# Altium PCB Jukebox PCB.PCBDOC (part 2 of 3)
Units mil, origin at the board's own origin, x right, y up, seen from the top; angles counter-clockwise.
Board outline 8310.03 x 5810.03 mil, 2 copper layers (Top Layer, Bottom Layer); 153 components, 235 nets, 1170 pads, 408 vias.
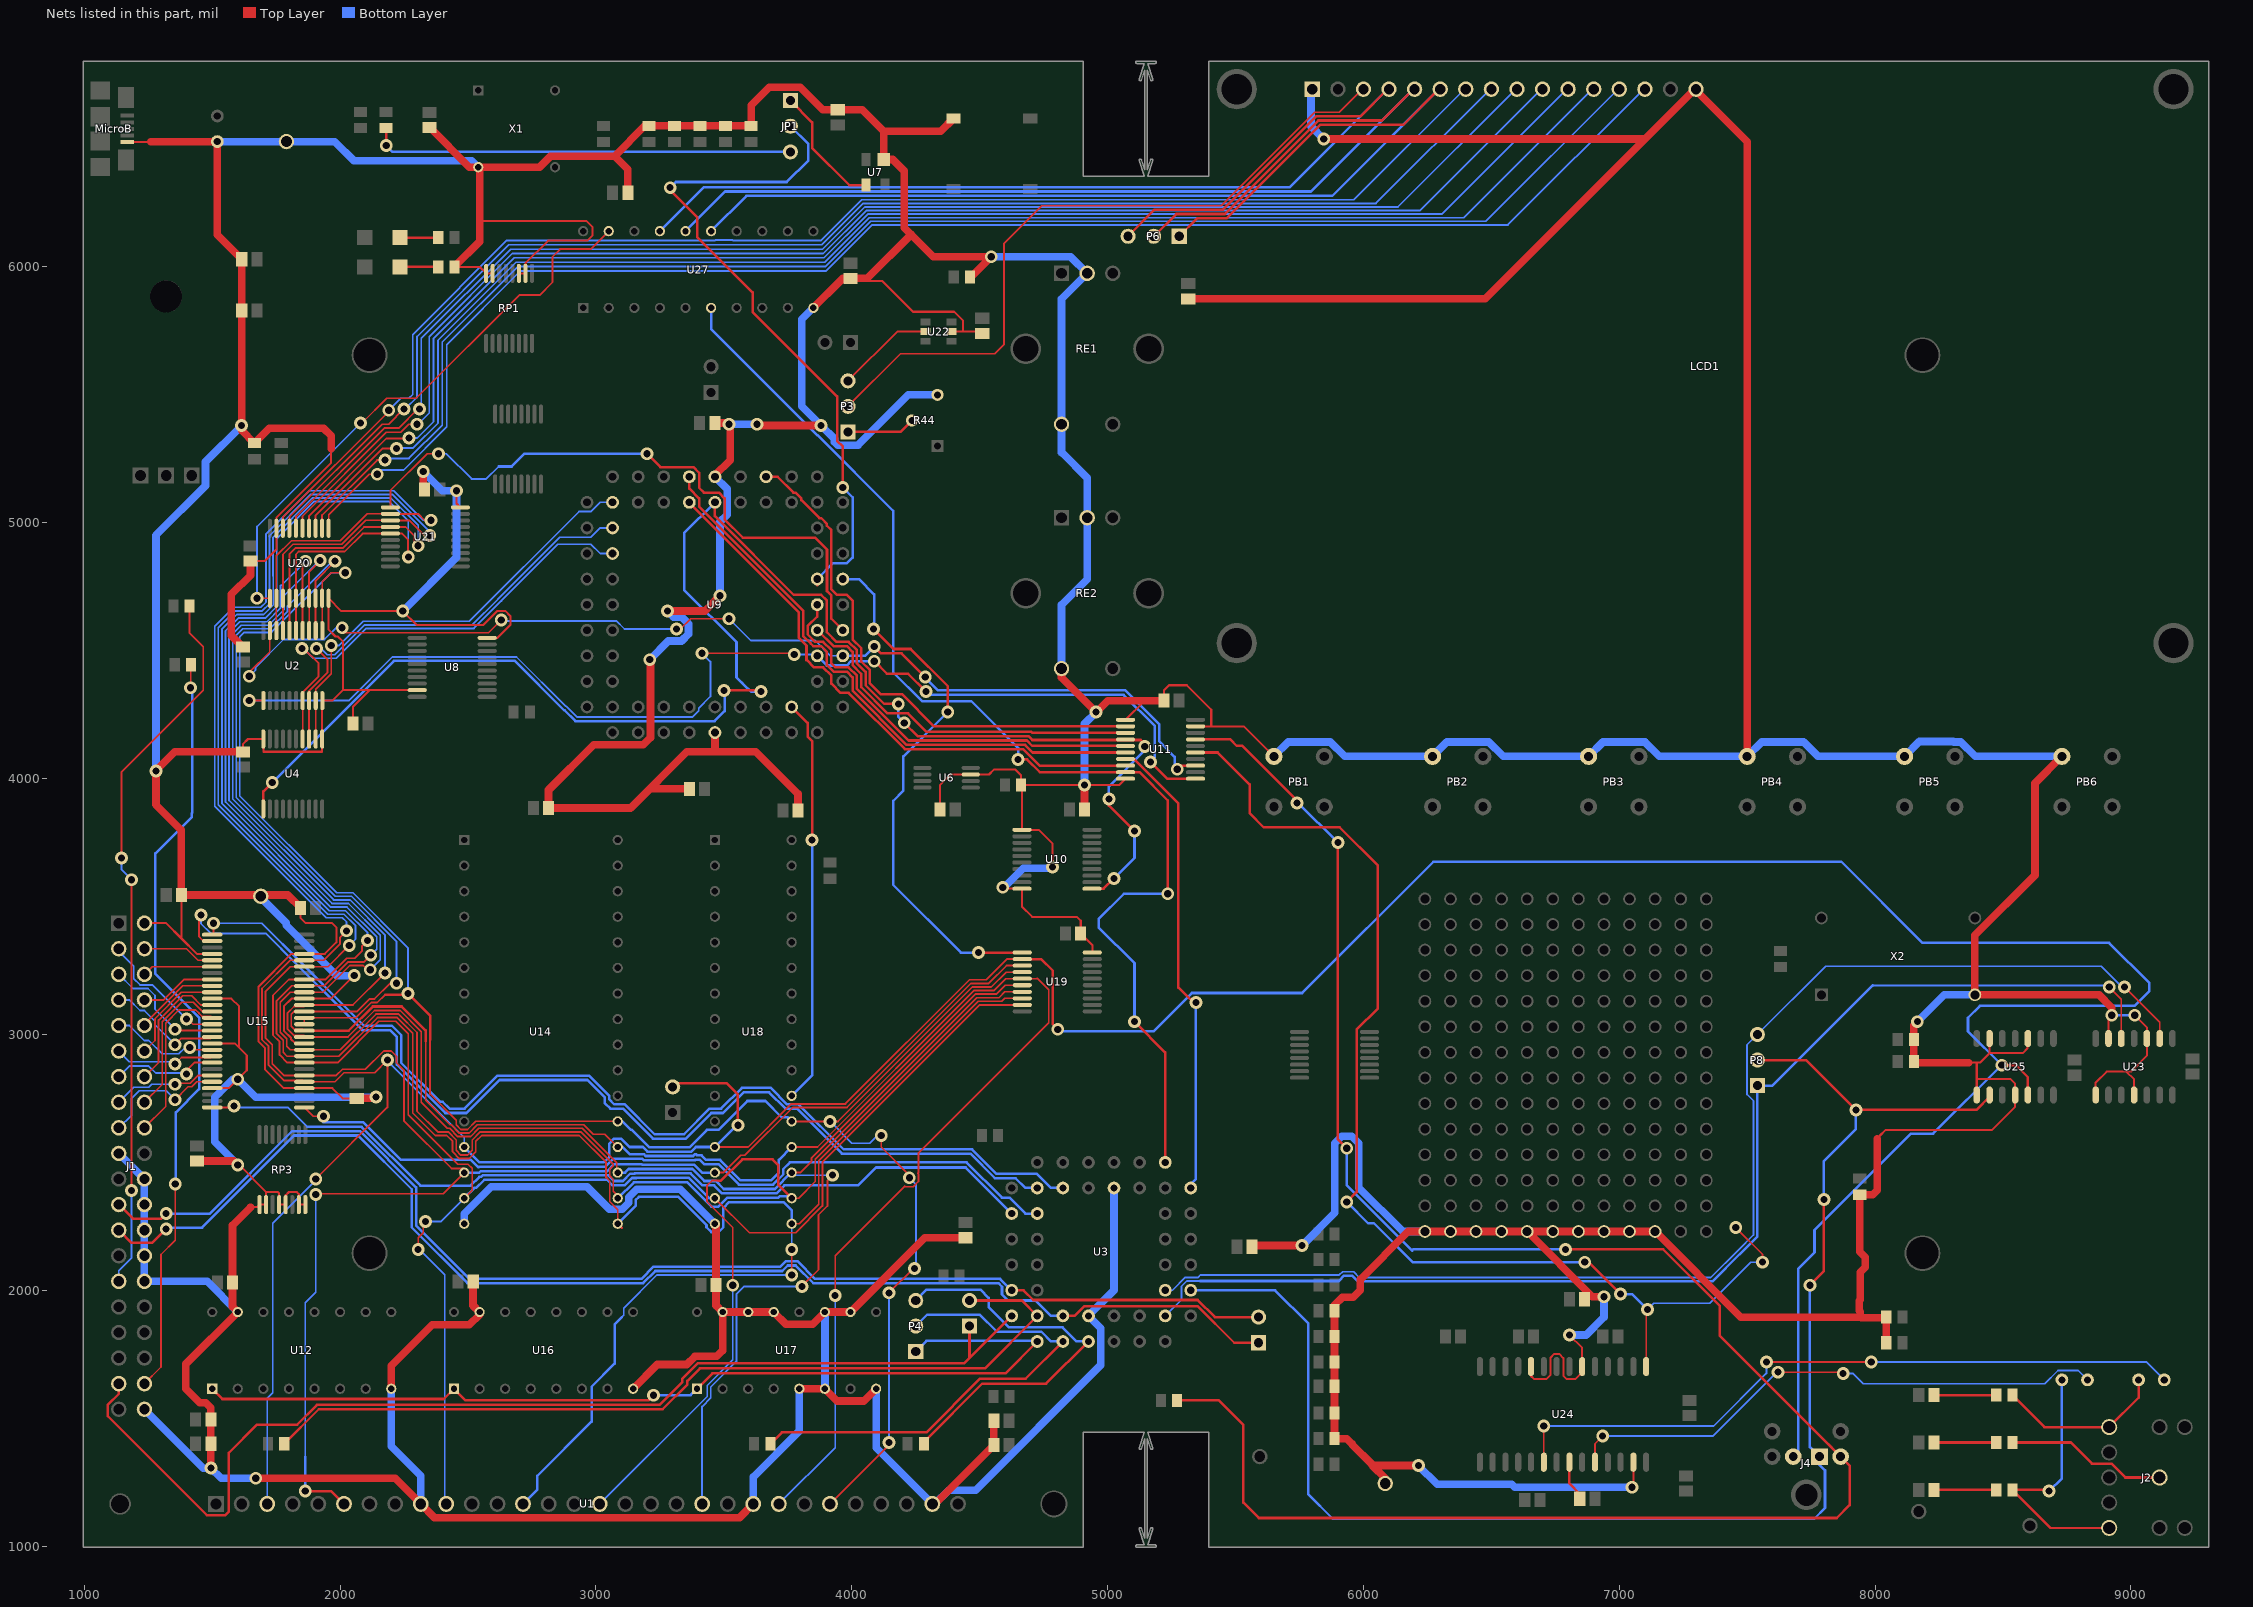
[diagram p2: the nets of this part, all layers, seen from the top]

## Via types
v1: diameter 50, hole 28, Top Layer to Bottom Layer, 408 vias

## Nets (pads, with @x,y where several pads share a name; then routed paths per layer and width w, separated by ;. In a path a pad name is that pad's centre, name@x,y a point inside that pad or via, vN(x,y) a via of type N, cw(c..) or ccw(c..) an arc to the next point about the centre after c; other vN are vias at no path point) (continued)
CPU_AD5: U2.7 U4.4 U9.6 | length 1840.2
  Top Layer w7: v1(1851,4508.32) 1857.8,4508.32 1915.9,4450.22 1915.9,4400.5 1853.54,4338.14 U2.7@1853.54,4305 1853.54,4155.31 U4.4@1853.23,4155
  Bottom Layer w7: v1(1851,4508.32) 1857.8,4508.32 1895.62,4470.5 1985.5,4470.5 2102,4587 2523,4587 2630.5,4694.5 2630.5,4695.5 2851.4,4916.4 2980.08,4916.4 3016.48,4880 U9.6@3065,4880
CPU_AD6: U2.8 U4.3 U9.4 | length 1773.7
  Top Layer w7: U4.3@1878.82,4155 1878.82,4343.62 1951,4415.8 1951,4465.32 v1(1908,4508.32)
  Bottom Layer w7: v1(1908,4508.32) 1926.47,4508.32 1950.3,4484.5 1979.7,4484.5 2096.2,4601 2517.2,4601 2616.5,4700.3 2616.5,4701.3 2858.8,4943.6 2980.08,4943.6 3016.48,4980 U9.4@3065,4980
CPU_AD7: U2.9 U4.2 U9.2 | length 1722.1
  Top Layer w7: U4.2@1904.41,4155 1904.72,4155.31 U2.9@1904.72,4305 1904.72,4349.72 1965,4410 v1(1965,4520)
  Bottom Layer w7: v1(1965,4520) 1995,4520 2090,4615 2505,4615 2933.6,5043.6 2980.08,5043.6 3016.48,5080 U9.2@3065,5080
CPU_ALE: U4.11 U9.61 U10.11 U11.4 | length 6389.7
  Top Layer w10: U4.11@1699.69,3881.38 1699.69,3949.69 v1(1735,3985) ; U9.61@3465,5080 3465,5025.96 3773.06,4717.9 3880.7,4717.9 3902.9,4695.7 3902.9,4572.1 3940.1,4534.9 3987.74,4534.9 4019.9,4502.74 4019.9,4450.82 4053.9,4416.82 4053.9,4364.91 4126.81,4292 v1(4182,4292) ; v1(3500,4345) 3640,4345 v1(3645,4340) ; v1(4205.05,4218) 4257.05,4166 4691.12,4166 4706.06,4151.06 5128.94,4151.06 5145,4135 v1(5145,4125) ; U10.11@4938.62,3569.69 4984.69,3569.69 v1(5025,3610) ; v1(5005,3920) 5005,3895 v1(5105,3795)
  Bottom Layer w10: v1(1735,3985) 2210,4460 2683.08,4460 2876.08,4267 2878,4267 2920,4225 3463.6,4225 3502.9,4264.3 3502.9,4342.1 v1(3500,4345) ; U9.61@3465,5080 3345,4960 3345,4738.08 3549.33,4533.76 3549.33,4396.08 3571,4374.41 3571,4374 3593.1,4351.9 3594.78,4351.9 3606.68,4340 v1(3645,4340) ; v1(4182,4292) 4182,4241.05 v1(4205.05,4218) ; v1(5005,3920) 5005,3970 5145,4110 v1(5145,4125) ; v1(5025,3610) 5105,3690 v1(5105,3795)
CPU_CLK: U9.56 U11.2 | length 2102.9
  Top Layer w10: U9.56@3665,5180 3710,5180 3772.1,5117.9 3780.7,5117.9 3802.9,5095.7 3802.9,5088.5 3873.5,5017.9 3880.7,5017.9 3902.9,4995.7 3902.9,4988.5 3920,4971.4 3920,4740 3942.1,4717.9 3980.7,4717.9 4002.9,4695.7 4002.9,4543.78 4036.9,4509.78 4036.9,4457.86 4070.9,4423.86 4070.9,4371.95 4113.85,4329 4197.33,4329 4321.92,4204.41 U11.2@5070,4204.41
CPU_DEN: U2.19 U9.39 U11.13 | length 4409.1
  Top Layer w7: v1(1645,4400) 1645,4415 1725,4495 1725,4578.03 U2.19@1725.59,4578.62 ; v1(2007.92,4590) 2007.92,4570 2580,4570 v1(2630,4620) ; v1(3315,4585) 3330,4585 3370,4625 v1(3520,4625)
  Top Layer w10: v1(4088,4516.09) 4114.38,4489.71 4194.29,4489.71 v1(4287,4397) ; v1(5272.3,4036.69) 5286.48,4050.87 U11.13@5343.62,4050.87
  Bottom Layer w7: v1(1645,4400) 1669.5,4424.5 1669.5,4434.7 1778.62,4543.82 1938.62,4543.82 1984.8,4590 v1(2007.92,4590) ; v1(2630,4620) 2633.6,4616.4 3080.08,4616.4 3111.48,4585 v1(3315,4585) ; v1(3520,4625) 3605,4540 3856.48,4540 3916.48,4480 U9.39@3965,4480
  Bottom Layer w10: U9.39@3965,4480 4051.91,4480 v1(4088,4516.09) ; v1(4287,4397) 4287,4395.33 4337.65,4344.67 5069.37,4344.67 5202,4212.04 5202,4145.33 5262,4085.33 5262,4046.98 v1(5272.3,4036.69)
CPU_DTR: U2.1 U9.40 U11.11 | length 4507.2
  Top Layer w7: v1(1645,4305) U2.1@1700,4305 ; v1(3415,4490) 3770,4490 v1(3775,4485)
  Top Layer w10: v1(4088,4459.09) 4137.09,4410 4220,4410 v1(4290,4340) ; v1(5167.39,4064.71) 5232.41,3999.69 U11.11@5343.62,3999.69
  Bottom Layer w7: v1(1645,4305) 2033.08,4305 2203.58,4475.5 2689.5,4475.5 2882.5,4282.5 2884.42,4282.5 2926.42,4240.5 3376.98,4240.5 3401.4,4264.92 3401.4,4275.06 3447.5,4321.16 3447.5,4457.5 v1(3415,4490) ; v1(3775,4485) 3860,4485 U9.40@3865,4480
  Bottom Layer w10: U9.40@3865,4480 3902.9,4442.1 3980.7,4442.1 3997.69,4459.09 v1(4088,4459.09) ; v1(4290,4340) 4290,4327.67 5062.33,4327.67 5185,4205 5185,4082.33 v1(5167.39,4064.71)
CPU_RD: U9.62 U11.6 | length 2316.5
  Top Layer w10: U9.62@3365,5180 3365,5133.6 3402.9,5095.7 3402.9,5064.02 3810.1,4656.82 3810.1,4557.26 3839.94,4527.42 3839.94,4527.26 3849.3,4517.9 3880.7,4517.9 3902.9,4495.7 3902.9,4443.78 3928.78,4417.9 3980.7,4417.9 4002.9,4395.7 4002.9,4343.78 4214.68,4132 4677.04,4132 4706.99,4102.05 U11.6@5070,4102.05
CPU_WR: U9.63 U11.8 | length 2242.8
  Top Layer w10: U9.63@3365,5080 3365,5077.88 3793.1,4649.78 3793.1,4550.22 3822.94,4520.38 3822.94,4463 3824.12,4463 3852.22,4434.9 3887.74,4434.9 3919.9,4402.74 3919.9,4371.5 3956.5,4334.9 3987.74,4334.9 4207.64,4115 4670,4115 4734.13,4050.87 U11.8@5070,4050.87
D0: J4.2 P7.2 U1.3 U2.18 U14.13 U15.5 U15.24 U18.13 U19.12 U20.2 U21.12 U25.5 | length 18721.9
  Top Layer w7: U2.18@1751.18,4578.62 1750.59,4579.21 U20.2@1750.59,4705 1750.59,4870.59 1809.82,4929.82 2000.42,4929.82 2105.6,5035 U21.12@2183.47,5035 ; v1(1905,2435) 2185,2715 v1(2185,2900) 2135.5,2850.5 2125.3,2850.5 2124.8,2850 2015,2850 1980,2815 U15.5@1860,2815 1854.4,2820.6 1779.9,2820.6 1720.5,2880 1720.5,2953.64 1694.6,2979.54 1694.6,3179.6 1805,3290 U15.24@1860,3290 1935.51,3290 2000,3354.49 2000,3380 v1(2025,3405) ; U21.12@2196.38,5034.72 2305.28,5034.72 2329.8,5010.2 v1(2355,5010.2) ; U18.13@3465,2560 3595,2560 3763.6,2728.6 3975.01,2728.6 4460,3213.59 4525.3,3213.59 4606.43,3294.72 U19.12@4666.38,3294.72
  Top Layer w10: P7.2@3300,2795 3315,2810 3510,2810 3555,2765 v1(3555,2645) ; U19.12@4666.38,3294.72 4740.28,3294.72 4785.5,3249.5 4785.5,3039.5 v1(4805,3020) ; v1(8495,2880) 8550,2880 8597.2,2832.8 U25.5@8597.2,2763.46
  Bottom Layer w7: U1.3@1715,1165 1715,1578.52 1736.4,1599.92 1736.4,2261.4 1905,2430 v1(1905,2435) ; v1(2025,3405) 2025,3440 2009.1,3455.9 1945.51,3455.9 1510,3891.41 1510,4595 1584.5,4669.5 1689.7,4669.5 1710.5,4690.3 1710.5,4774 1710,4774.5 1710,4955 1880,5125 2209.8,5125 2324.59,5010.2 v1(2355,5010.2) ; v1(2185,2900) 2185,2897.2 2485,2597.2 U14.13@2485,2560
  Bottom Layer w10: U14.13@2485,2560 2545,2500 3030.39,2500 3052.1,2521.71 3052.1,2573.63 3071.37,2592.9 3098.63,2592.9 3131.53,2560 3183.44,2560 3201.44,2542 3372.6,2542 3390.6,2560 U18.13@3465,2560 3550,2645 v1(3555,2645) ; v1(4805,3020) 4812,3013 5180.67,3013 5329.67,3162 5760,3162 6273,3675 7867.67,3675 8184.67,3358 8914.33,3358 9072,3200.33 9072,3169.67 9014.33,3112 8409.67,3112 8363,3065.33 8363,3012 v1(8495,2880) 8227,2612 8139.77,2612 7763,2235.23 7763,2148 7700,2085 7700,1370.04 J4.2@7679.96,1350
D1: U1.6 U2.17 U14.14 U15.6 U15.23 U18.14 U19.13 U20.3 U21.13 | length 10072.1
  Top Layer w7: U2.17@1776.77,4578.62 1776.77,4704.41 U20.3@1776.18,4705 1776.18,4876.18 1815.82,4915.82 2006.22,4915.82 2100.4,5010 U21.13@2182.88,5010 ; v1(1905,2375) 1907.5,2377.5 2402.5,2377.5 U14.14@2485,2460 2485,2476 2435.77,2476 2249.5,2662.27 2249.5,2860.5 2220.5,2889.5 2220.5,2914.7 2199.7,2935.5 2170.3,2935.5 2098.8,2864 2009.2,2864 1985.2,2840 U15.6@1860,2840 1780.3,2840 1734.5,2885.8 1734.5,2959.44 1708.6,2985.34 1708.6,3169.11 1804.49,3265 U15.23@1860,3265 1952.5,3265 v1(2035.5,3348) ; U21.13@2196.38,5009.13 2270.87,5009.13 2330,4950 v1(2350,4950) ; U18.14@3465,2460 3498.08,2460 3565.58,2527.5 3582.3,2527.5 3769.4,2714.6 3980.81,2714.6 4465.8,3199.59 4535.34,3199.59 4604.88,3269.13 U19.13@4666.38,3269.13
  Top Layer w10: v1(1863.6,1215) 1965,1215 U1.6@2015,1165
  Bottom Layer w7: 1863.6,1350 1863.6,1951.4 1905,1992.8 v1(1905,2375) ; v1(2035.5,3348) 2060.5,3373 2060.5,3424.5 2015.1,3469.9 1951.31,3469.9 1524,3897.21 1524,4589.2 1590.3,4655.5 1695.5,4655.5 1724.5,4684.5 1724.5,4784.5 1724,4785 1724,4949.2 1885.8,5111 2204,5111 2350,4965 v1(2350,4950)
  Bottom Layer w10: v1(1863.6,1215) 1863.6,1350 ; U14.14@2485,2460 2543.73,2460 2549.73,2466 3044.47,2466 3071.37,2492.9 3178.42,2492.9 3180.32,2491 3383.64,2491 3414.64,2460 U18.14@3465,2460
D2: U1.10 U2.16 U14.15 U15.8 U15.21 U18.15 U19.19 U20.4 U21.14 | length 9889.1
  Top Layer w7: U2.16@1802.36,4578.62 1801.77,4579.21 U20.4@1801.77,4705 1801.77,4876.77 1826.82,4901.82 2012.02,4901.82 2093.74,4983.54 U21.14@2196.38,4983.54 2256.46,4983.54 2290,4950 2290,4925 v1(2305,4910) v1@2300,4905 ; v1(2107.5,3367.19) 2086,3345.69 2086,3327.08 2056.42,3297.5 2026.01,3297.5 1943.51,3215 U15.21@1860,3215 1800,3215 1737.6,3152.6 1737.6,2997.35 1763.5,2971.45 1763.5,2920 1793.5,2890 U15.8@1860,2890 1990,2890 2151.77,3051.77 2216.91,3051.77 2266.5,3002.18 2266.5,2686.01 2459.51,2493 2500,2493 2516.4,2476.6 2516.4,2391.4 U14.15@2485,2360 ; v1(2305,2160) 2305,2205 2325,2225 2325,2259.33 v1(2334,2268.33) ; U18.15@3465,2360 3600,2225 3780.2,2225 3885,2329.8 3885,2500 4500.59,3115.59 U19.19@4666.38,3115.59
  Bottom Layer w7: v1(2107.5,3367.19) 2107.5,3397.5 2021.1,3483.9 1957.11,3483.9 1538,3903.01 1538,4583.4 1596.1,4641.5 1701.3,4641.5 1738.5,4678.7 1738.5,4790.8 1738,4791.3 1738,4943.4 1891.6,5097 2198.2,5097 2305,4990.2 v1(2305,4910) ; v1(2305,2160) 2310,2160 2408.6,2061.4 2408.6,1171.4 U1.10@2415,1165 ; v1(2334,2268.33) 2393.33,2268.33 U14.15@2485,2360
  Bottom Layer w10: U14.15@2485,2360 2525,2400 2531.82,2400 2563.82,2432 3042.43,2432 3064.33,2410.1 3112.2,2410.1 3141.11,2439 3158.2,2439 3159.2,2440 3362.51,2440 3442.51,2360 U18.15@3465,2360
D3: U1.13 U2.15 U14.17 U15.9 U15.20 U18.17 U19.18 U20.5 U21.15 | length 10630
  Top Layer w7: U2.15@1827.95,4578.62 1827.95,4704.41 U20.5@1827.36,4705 1827.36,4877.36 1837.82,4887.82 2017.82,4887.82 2087.95,4957.95 U21.15@2196.38,4957.95 2242.05,4957.95 2265,4935 2265,4867.68 v1(2266.68,4866) ; v1(2120,3310) 2093.5,3283.5 2031.81,3283.5 1938.31,3190 U15.20@1860,3190 1810.2,3190 1751.6,3131.4 1751.6,3003.15 1777.5,2977.25 1777.5,2930 1792.5,2915 U15.9@1860,2915 1995.2,2915 2145.97,3065.77 2222.71,3065.77 2283.5,3004.98 2283.5,2693.05 2371.55,2605 2416.4,2605 2439.6,2581.8 2439.6,2541.19 2466.19,2514.6 2503.81,2514.6 2530.4,2541.19 2530.4,2581.8 2553.6,2605 2935,2605 3039.6,2500.4 3039.6,2441.19 3053.6,2427.19 3053.6,2346.99 3085,2315.59 U14.17@3085,2260 ; v1(3765,2060) v1(3765,2160) ; U18.17@3765,2260 3795.4,2260 3871,2335.6 3871,2505.8 4494.79,3129.59 4585.55,3129.59 4597.14,3141.18 U19.18@4666.38,3141.18
  Top Layer w10: U14.17@3085,2260 3100,2245
  Bottom Layer w7: v1(2120,3310) 2143,3333 2143,3381.89 2026.99,3497.9 1962.9,3497.9 1552,3908.8 1552,4577.6 1601.9,4627.5 1707.1,4627.5 1752.5,4672.9 1752.5,4797.1 1752,4797.6 1752,4937.6 1897.4,5083 2192.4,5083 2266.68,5008.72 v1(2266.68,4866) ; 3100,1894.04 3108.6,1902.64 3108.6,1930.08 3238.52,2060 v1(3765,2060) ; v1(3765,2160) U18.17@3765,2260
  Bottom Layer w10: U1.13@2715,1165 2771.1,1221.1 2771.1,1275.14 2982.9,1486.94 2982.9,1622.9 3073,1713 3073,1867.04 3100,1894.04 ; U14.17@3085,2260 3154.9,2329.9 3154.9,2331.05 3154.9,2352.39 3167.51,2365 3321.82,2365 3432.1,2254.72 3432.1,2246.37 3451.37,2227.1 3478.63,2227.1 3497.9,2246.37 3497.9,2322.33 3520.57,2345 3733.47,2345 3765,2313.47 U18.17@3765,2260
D4: U1.16 U2.14 U14.18 U15.10 U15.19 U18.18 U19.17 U20.6 | length 9033.6
  Top Layer w7: U2.14@1853.54,4578.62 1852.95,4579.21 U20.6@1852.95,4705 1852.95,4837.95 v1(1865,4850) ; v1(2118,3253) 2107,3253 2090.5,3269.5 2037.61,3269.5 1933.11,3165 U15.19@1860,3165 1805,3165 1765.6,3125.6 1765.6,3008.95 1791.5,2983.05 1791.5,2953.5 1805,2940 U15.10@1860,2940 2000.4,2940 2140.17,3079.77 2228.51,3079.77 2300.5,3007.78 2300.5,2700.09 2381.59,2619 2422.2,2619 2453.6,2587.6 2453.6,2546.99 2471.99,2528.6 2498.01,2528.6 2516.4,2546.99 2516.4,2587.6 2547.8,2619 2940.8,2619 3067.6,2492.2 3067.6,2487.01 3053.6,2473.01 3053.6,2446.99 3067.6,2432.99 3067.6,2387.4 3085,2370 U14.18@3085,2360 ; 3478.01,2428.6 3453.6,2428.6 3433.6,2408.6 3433.6,2346.99 3535,2245.59 v1(3535,2020) ; U18.18@3765,2360 3791.92,2360 3857,2425.08 3857,2511.6 4488.99,3143.59 4575.51,3143.59 4598.69,3166.77 U19.17@4666.38,3166.77
  Top Layer w10: 3478.01,2428.6 3488.6,2428.6 3572,2512 3690.33,2512 3712,2490.33 3712,2413 U18.18@3765,2360
  Bottom Layer w7: v1(1865,4850) 1770,4755 1766.5,4755 1766.5,4665.9 1714.1,4613.5 1607.7,4613.5 1566,4571.8 1566,3914.6 1968.7,3511.9 2032.79,3511.9 2157,3387.69 2157,3292 v1(2118,3253) ; U1.16@3015,1165 3435,1585 3435,1627.8 3535,1727.8 v1(3535,2020)
  Bottom Layer w10: U14.18@3085,2360 3086.15,2360 3148.15,2422 3165.24,2422 3166.24,2423 3355.47,2423 3451.37,2327.1 3478.63,2327.1 3513.53,2362 3713.17,2362 3718.17,2367 3758,2367 U18.18@3765,2360
D5: U1.20 U2.13 U14.19 U15.12 U15.17 U18.19 U19.16 U20.7 | length 8475.8
  Top Layer w7: U2.13@1879.13,4578.62 1879.13,4704.41 U20.7@1878.54,4705 1878.54,4808.86 v1(1922,4852.32) ; v1(2175,3240) 2050,3115 U15.17@1860,3115 1860,3109.4 1819.6,3109.4 1794.6,3084.4 1794.6,3020.96 1819.96,2995.6 1860,2995.6 U15.12@1860,2990 2030.6,2990 2134.37,3093.77 2234.31,3093.77 2317.5,3010.58 2317.5,2735.01 2419.51,2633 2428,2633 2460.4,2600.6 2509.6,2600.6 2542,2633 2946.6,2633 3081.6,2498 3081.6,2463.4 U14.19@3085,2460 ; U18.19@3765,2460 3798.23,2460 3843,2504.77 3843,2517.4 4483.19,3157.59 4565.47,3157.59 4600.24,3192.36 U19.16@4666.38,3192.36 ; v1(3805,2015) 3870,2080 3870,2295 3905,2330 3905,2430 v1(3925,2450)
  Bottom Layer w7: v1(1922,4852.32) 1917.53,4852.32 1780.5,4715.3 1780.5,4660.1 1719.9,4599.5 1613.49,4599.5 1580,4566.01 1580,3920.4 1974.5,3525.9 2038.59,3525.9 2175,3389.49 v1(2175,3240) ; U1.20@3415,1165 3415,1545.2 3449,1579.2 3449,1622 3549,1722 3549,1983.8 3580.2,2015 v1(3805,2015) ; U18.19@3765,2460 3775,2450 v1(3925,2450)
  Bottom Layer w10: U14.19@3085,2460 3114.02,2460 3128.02,2474 3376.6,2474 3423.5,2427.1 3468.47,2427.1 3499.57,2396 3699.08,2396 3763.08,2460 U18.19@3765,2460
D6: U1.23 U2.12 U14.20 U15.13 U15.16 U18.20 U19.15 U20.8 | length 9315.6
  Top Layer w7: U15.13@1860,3015 1854.4,3020.6 1819.96,3020.6 1808.6,3031.96 1808.6,3078.6 1820,3090 U15.16@1860,3090 2066.96,3090 2115.73,3138.77 2134.38,3138.77 2195.61,3200 v1(2220,3200) ; U2.12@1904.72,4578.62 1904.13,4579.21 U20.8@1904.13,4705 1904.13,4774.13 v1(1980,4850) ; 2334.5,2972.96 2334.5,2742.05 2429.55,2647 2433.79,2647 2466.19,2614.6 2503.81,2614.6 2536.21,2647 2952.4,2647 2989.4,2610 3035,2610 U14.20@3085,2560 ; U18.20@3765,2560 3865.8,2560 4477.39,3171.59 4555.42,3171.59 4601.79,3217.95 U19.15@4666.38,3217.95 4722.95,3217.95 4725,3220 4770,3175 4770,3045 4260.5,2535.5 4260.5,2460.5 4257.6,2457.6 4260.5,2454.7 4260.5,2425.3 4239.7,2404.5 4210.3,2404.5 4207.4,2407.4 3935,2135 v1(3935,1980)
  Top Layer w10: U15.13@1860,3015 2033.68,3015 2127.95,3109.27 2240.73,3109.27 2334.5,3015.5 2334.5,2972.96
  Bottom Layer w7: v1(1980,4850) 1969.88,4850 1794.5,4674.62 1794.5,4654.3 1725.7,4585.5 1619.29,4585.5 1594,4560.21 1594,3926.2 1980.3,3539.9 2044.39,3539.9 2220,3364.29 v1(2220,3200) ; U1.23@3715,1165 3935,1385 v1(3935,1980)
  Bottom Layer w10: U14.20@3085,2560 3103.24,2560 3131.24,2532 3187.4,2532 3194.4,2525 3379.64,2525 3386.64,2532 3390.72,2532 3395.62,2527.1 3412.9,2527.1 3430.1,2509.9 3485.67,2509.9 3565.57,2430 3685,2430 3715.1,2460.1 3715.1,2510.1 U18.20@3765,2560
D7: U1.25 U2.11 U14.21 U15.14 U15.15 U18.21 U19.14 U20.9 | length 8109.5
  Top Layer w7: U15.14@1860,3040 U15.15@1860,3065 2061.76,3065 2121.53,3124.77 2145.09,3124.77 2175.91,3155.59 ; U2.11@1930.32,4578.62 1930.32,4704.41 U20.9@1929.72,4705 1930,4705.28 1930,4770 1965,4805 v1(2020,4805) ; 2351.5,2980 2351.5,2767.34 2453.6,2665.24 2453.6,2646.99 2471.99,2628.6 2498.01,2628.6 2530.41,2661 3084,2661 U14.21@3085,2660 ; U18.21@3765,2660 v1(3915,2660) 3946.01,2660 4471.6,3185.59 4545.38,3185.59 4603.34,3243.54 U19.14@4666.38,3243.54 ; U1.25@3915,1165 4145,1395 v1(4145,1405) ; v1(4115,2605) 4115,2560 4225,2450 v1(4225,2440) ; v1(4145,1990) 4240,2085 v1(4245,2085)
  Top Layer w10: 2175.91,3155.59 2260.59,3155.59 v1(2265,3160) 2351.5,3073.5 2351.5,2980
  Bottom Layer w7: v1(2020,4805) 1965,4805 1731.5,4571.5 1625.09,4571.5 1608,4554.41 1608,3932 1986.1,3553.9 2050.19,3553.9 2265,3339.09 v1(2265,3160) ; v1(3915,2660) 4000.5,2574.5 4069.7,2574.5 4115,2619.8 v1(4115,2605) ; v1(4145,1405) v1(4145,1990) ; v1(4225,2440) 4250.5,2414.5 4250.5,2090.5 v1(4245,2085)
  Bottom Layer w10: U14.21@3085,2660 3103.24,2660 3136.14,2627.1 3140.39,2627.1 3208.49,2559 3365.56,2559 3433.66,2627.1 3478.63,2627.1 3591.53,2740 3662.33,2740 3726.23,2676.1 3748.9,2676.1 U18.21@3765,2660
DEN: U3.39 U11.7 | length 1830.2
  Top Layer w10: U11.7@5070,4076.46 5103.32,4076.46 5276.5,3903.27 5276.5,3183.5 5335,3125 v1(5345,3125)
  Bottom Layer w10: U3.39@5325,2400 5317.5,2407.5 5345,2435 v1(5345,3125)
DISP_CS: LCD1.4 P6.3 U27.17 | length 4328.1
  Top Layer w10: P6.3@5080,6120 5184,6224 5450.92,6224 5816.42,6589.5 5989.5,6589.5 LCD1.4@6095,6695
  Bottom Layer w10: U27.17@3250,6140 3422,6312 5712,6312 LCD1.4@6095,6695
DISP_DIR: U20.1 U27.19 | length 2242
  Top Layer w7: v1(1675,4705) U20.1@1725,4705 ; v1(2080,5390) 2085.55,5390 2182.05,5486.5 2296.5,5486.5 2700,5890 2780,5890 2830,5940 2830,6040 2860,6070 2980,6070 U27.19@3050,6140
  Bottom Layer w7: v1(1675,4705) 1675,4985 v1(2080,5390)
DISP_E: LCD1.6 P6.1 U27.15 | length 4328.1
  Top Layer w10: P6.1@5280,6120 5350,6190 5465,6190 5830.5,6555.5 6155.5,6555.5 LCD1.6@6295,6695
  Bottom Layer w10: U27.15@3450,6140 3588,6278 5878,6278 LCD1.6@6295,6695
DISP_RW: LCD1.5 P6.2 U27.16 | length 4328.1
  Top Layer w10: P6.2@5180,6120 5182,6120 5269,6207 5457.96,6207 5823.46,6572.5 6072.5,6572.5 LCD1.5@6195,6695
  Bottom Layer w10: U27.16@3350,6140 3505,6295 5795,6295 LCD1.5@6195,6695
DRAM_CAS: P1.2 R58.2 U3.19 | length 3448.2
  Top Layer w10: R58.2@1781.5,1400 1916.5,1535 3260,1535 3357.1,1632.1 3357.1,1645.34 3406.76,1695 4520,1695 U3.19@4725,1900 4665,1960 P1.2@4460,1960
DRAM_RAS: P4.3 R57.2 U3.22 | length 1609.9
  Top Layer w10: R57.2@4281.5,1400 4281.5,1406.5 4510,1635 4760,1635 U3.22@4925,1800
  Bottom Layer w10: P4.3@4250,1960 4292.43,2002.43 4502.57,2002.43 4535,1970 4535,1935 4615.1,1854.9 4823.7,1854.9 4878.6,1800 U3.22@4925,1800
DRAM_WE: P4.2 R59.2 U3.20 | length 1946.3
  Top Layer w10: R59.2@3681.5,1400 3726.5,1445 4291.72,1445 4501.72,1655 4680,1655 U3.20@4825,1800
  Bottom Layer w10: P4.2@4250,1860 4295,1905 4500,1905 4567.1,1837.9 4740.7,1837.9 4778.6,1800 U3.20@4825,1800
DTR: U3.40 U11.9 U27.6 | length 4761.3
  Top Layer w10: v1(4650,4075) 4685,4075 4734.72,4025.28 U11.9@5070,4025.28 5124.72,4025.28 5235,3915 v1(5235,3550) ; v1(5105,3050) 5225,2930 U3.40@5225,2500
  Bottom Layer w10: U27.6@3450,5840 3450,5758.08 3843,5365.08 3843,5364.67 3864.67,5343 3865.08,5343 4162,5046.08 4162,4415.67 4274.67,4303 4467,4303 4650,4120 v1(4650,4075) ; v1(5105,3050) 5105,3278.43 4965,3418.43 4965,3451.57 5063.43,3550 v1(5235,3550)
GND: C0.2 C1.2 C2.1 C3.2 C4.1 C5.1 C6.1 C7.1 C8.1 C9.1 C10.1 C11.1 C12.1 C13.1 C14.1 C15.1 C16.1 C17.1 C18.1 C19.1 C20.1 C21.1 C22.1 C23.1 C24.1 C25.1 C26.1 C27.1 C28.1 C29.1 C30.1 C31.1 C32.1 C40.1 C50.2 C51.2 J1.2 J1.19 J1.22 J1.24 J1.26 J1.28 J1.30 J1.40 LCD1.1 LCD1.16 MicroB.5 pad.0@1690,3540 pad.0@1790,6490 pad.0@6085,1245 pad.26@6240,2230 pad.26@6340,2230 pad.26@6440,2230 pad.26@6540,2230 pad.26@6640,2230 pad.26@6740,2230 pad.26@6840,2230 pad.26@6940,2230 pad.26@7040,2230 pad.26@7140,2230 PB1.1 PB2.1 PB3.1 PB4.1 PB5.1 PB6.1 PB8.1 R2.2 R12.1 R13.1 R26.2 R28.2 R29.2 R31.2 R32.2 R40.1 R44.3 R45.2 R48.2 R49.1 R50.1 R55.2 R56.2 R60.1 R61.1 R62.1 R63.2 R64.2 RE1.2 RE1.5 RE2.2 RE2.5 RP1.2 RP1.3 RP1.7 RP1.8 RP3.1 RP3.2 RP3.4 RP3.5 RP3.7 RP3.8 U1.9 U1.22 U1.29 U2.10 U3.1 U3.23 U4.1 U4.10 U6.3 U7.1 U8.10 U8.19 U9.26 U9.60 U10.1 U10.10 U11.1 U11.10 U11.19 U12.8 U12.15 U14.16 U15.4 U15.11 U15.18 U15.25 U15.32 U15.39 U15.46 U15.53 U16.8 U16.15 U17.5 U17.6 U17.8 U17.10 U17.11 U17.13 U17.14 U17.15 U18.16 U19.10 U20.10 U20.19 U21.10 U22.2 U23.1 U23.4 U23.10 U23.13 U24.6 U24.10 U24.27 U25.1 U25.4 U25.10 U25.13 U27.10 X1.2 X2.2 | length 67391.7
  Top Layer w8: MicroB.5@1167.72,6488.78 1258.78,6488.78 1260,6490 ; J1.2@1235,3435 1320,3435 1380,3375 ; C27.1@1380,3545 1380,3375 ; U15.53@1500,2790 1565,2790 v1(1600,2825) 1635,2860 1635,2918.23 1605,2948.23 ; U15.46@1500,2965 1588.23,2965 1605,2948.23 ; U15.39@1500,3140 1575,3140 1605,3110 1605,2948.23 ; U15.32@1500,3315 1440,3315 1380,3375 ; v1(1600,2490) 1605,2490 1710,2385 ; C24.1@1620,4104.53 1620,4135 1640,4155 U4.10@1699.69,4155 1699.69,4105 1930,4105 U4.1@1930,4155 1930,4304.68 1969.68,4304.68 2010.59,4345.59 ; 1650,2325 1675,2325 RP3.1@1685,2335 RP3.2@1710.59,2335 1710,2335.59 1710,2385 ; C20.1@1650,4850.47 1705.47,4850.47 1750.59,4895.59 U20.19@1750.59,4978.62 1750.59,5020.26 1965,5234.67 1965,5290 ; C15.1@1845.47,3495 1845.47,3454.53 1865,3435 1968.79,3435 1985,3418.79 1985,3360 1940,3315 U15.25@1860,3315 1809.49,3315 1680.1,3185.61 1680.1,2973.54 1706,2947.64 1706,2864 1780,2790 U15.4@1860,2790 1970,2790 2009.53,2750.47 C28.1@2065,2750.47 ; U15.11@1860,2965 1824.86,2965 1808.1,2981.76 1808.1,2986.96 1780.1,3014.96 1780.1,3110.1 1810,3140 U15.18@1860,3140 1963,3140 2053,3230 v1(2055,3230) ; RP3.8@1864.13,2335 RP3.7@1838.54,2335 1838.54,2375.76 1830,2384.3 1800,2384.3 1787.36,2371.66 RP3.5@1787.36,2335 RP3.4@1761.77,2335 1761.77,2378.23 1755.7,2384.3 1710.7,2384.3 1710,2385 ; C8.1@2050.47,4215 2050.47,4281.06 2115,4345.59 ; U8.19@2301.38,4345.59 2115,4345.59 ; R40.1@2446.5,6000 2545.87,6000 RP1.8@2570.87,5975 RP1.7@2596.46,5975 ; v1(2455,5125) 2455,5075.31 U21.10@2470,5060.31 ; 2545.87,6180 2962.18,6180 2986.9,6155.28 2986.9,6124.72 2965.28,6103.1 2813.1,6103.1 2724.41,6014.41 RP1.2@2724.41,5975 RP1.3@2698.82,5975 ; U8.10@2575,4550.32 2614.68,4550.32 2615,4550 2666,4601 2666,4634.91 2644.91,4656 2615.09,4656 2559.63,4600.54 2299.46,4600.54 v1(2245,4655) 2004.68,4655 U20.10@1955.32,4704.37 ; 3955,5945 4119.09,5945 4239.09,5825 4400,5825 4435,5790 4435,5747.5 ; C6.1@4345.47,3880 4345.47,3975.47 4386.18,4016.18 U6.3@4465,4016.18 4536.18,4016.18 4555,4035 4640,4035 4661.5,4013.5 R2.2@4661.5,3975 ; U22.2@4390,5747.5 4435,5747.5 ; C22.1@4510,5740.47 4502.97,5747.5 4435,5747.5 ; v1(4590,3575) 4595.31,3569.69 U10.10@4665,3569.69 4665,3500 4705,3460 4880,3460 4895,3445 4895,3395.47 C19.1@4894.53,3395 4940,3349.53 U19.10@4940,3320.32 ; v1(4785,3655) 4785,3745 4730,3800 U10.1@4665,3800 4665,3971.5 R2.2@4661.5,3975 ; v1(4909.53,3974.53) v1@4910,3975 ; U11.10@5070,3999.69 5045.31,3975 v1@4910,3975 ; U11.1@5070,4230 5145,4305 ; C11.1@5220.47,4305 5220.47,4345.47 5240,4365 5310,4365 5405,4270 5405,4204.41 ; U11.19@5343.62,4204.41 5405,4204.41 ; PB1.1@5650,4086.85 5532.44,4204.41 5405,4204.41 ; U24.10@6655,1702.01 6655,1665 6667.29,1652.71 6714.82,1652.71 6731.29,1669.17 6731.29,1737.42 6745.18,1751.31 6764.82,1751.31 6781.29,1734.84 6781.29,1666.6 6795.18,1652.71 6828.71,1652.71 ; v1(6805,1825) 6855,1775 U24.6@6855,1702.01 6855,1680 6827.71,1652.71 ; v1(7050,1230) 7055,1235 U24.27@7055,1327.99 ; 8019,2604.91 8040.09,2626 8456,2626 8547.2,2717.2 U25.4@8547.2,2763.46 8547.2,2807.8 8529.37,2825.63 8397.2,2825.63 ; 8365,2890 8395,2890 ; U25.1@8397.2,2763.46 8397.2,2825.63 ; U25.13@8447.2,2983.94 8447.2,2927.2 ; U25.10@8597.2,2983.94 8595,2981.73 8595,2945 8577.2,2927.2 8447.2,2927.2 ; U23.1@8862.2,2763.46 8862.2,2812.2 8905,2855 8982.2,2855 ; U23.13@8912.2,2983.94 8912.2,3062.2 v1(8925,3075) ; U23.4@9010,2761.26 U23.4@9012.2,2763.46 9012.2,2825 8982.2,2855 ; v1(9015,3075) 9062.2,3027.8 U23.10@9062.2,2983.94 9062.2,2917.2 9000,2855 8982.2,2855 ; U20.10@1955.32,4704.37 U20.10@1955.32,4705 1955,4704.68 U20.10@1955.32,4704.37 ; U20.10@1955.32,4704.37 1955.32,4582.1 1981.91,4555.5 1991.51,4555.5 2010.59,4536.42 2010.59,4345.59 ; 2010.59,4345.59 2115,4345.59 ; R2.2@4661.5,3975 v1@4910,3975 ; 8395,2890 8410,2890 8447.2,2927.2 ; 8395,2890 8397.2,2887.8 8397.2,2825.63
  Top Layer w30: 1260,6490 C0.2@1520,6490 1520,6125.47 C50.2@1615.47,6030 C51.2@1615.47,5830 v1@1615.47,5380 ; C23.1@1440,2505.47 1584.53,2505.47 v1(1600,2490) ; v1(1495,1305) 1494.53,1305.47 C1.2@1494.53,1400 C2.1@1494.53,1495 1494.53,1540.47 1475,1560 1452,1560 1397,1615 1397,1712 U12.15@1600,1915 1579.53,1935.47 1579.53,2254.53 1650,2325 ; v1@1615.47,5361.02 R45.2@1665,5311.5 1723.5,5370 1935,5370 1965,5340 1965,5290 ; C24.1@1620,4104.53 1353.06,4104.53 1280,4031.47 v1(1280,4030) 1280,3898.53 1379.53,3799 C27.1@1379.53,3545 1380,3545 1795.47,3545 C15.1@1845.47,3495 ; C25.1@1620,4514.53 1575,4559.53 1575,4720 1650,4795 C20.1@1650,4850.47 ; v1(1670,1265) 2215,1265 U1.9@2315,1165 2368.9,1111.1 3561.1,1111.1 U1.22@3615,1165 ; C28.1@2065,2750.47 2135.47,2750.47 v1(2140,2755) ; U12.8@2200,1615 2200,1705 2360,1865 2505,1865 2545,1905 U16.15@2545,1915 2519.53,1940.47 2519.53,2005 ; v1(2325,5200) 2325,5135.47 C21.1@2330.47,5130 ; C29.1@2350,6545.47 2505.47,6390 X1.2@2540,6390 ; R40.1@2446.5,6000 2545.87,6099.37 2545.87,6180 2545.87,6384.13 X1.2@2540,6390 ; C5.1@3124.53,6290 3124.53,6381.27 3072.9,6432.9 ; U16.8@3145,1615 3240,1710 3355.29,1710 3387.29,1742 3472,1742 3495,1765 U17.15@3495,1915 ; v1(3210,4465) 3212.9,4462.1 3212.9,4160.16 3184.84,4132.1 2991.2,4132.1 2814.53,3955.43 C14.1@2814.53,3885 3135,3885 3355,4105 3465,4105 ; 3215,3960 C9.1@3365.47,3960 ; v1(3280,4655) 3425,4655 v1(3485,4715) ; C13.1@3464.53,5390 v1@3515,5390 ; U18.16@3465,2260 3469.53,2255.47 3469.53,1940.47 U17.15@3495,1915 ; U9.26@3465,4180 3465,4105 ; U9.60@3465,5180 3465,5185 3524.53,5244.53 3524.53,5380.47 v1(3520,5385) ; v1(3630,5385) 3635,5380 v1(3880,5380) ; C18.1@3789.53,3875 3789.53,3940.47 3625,4105 3465,4105 ; U17.5@3795,1615 U17.6@3895,1615 3942.9,1567.1 4047.1,1567.1 U17.8@4095,1615 ; U27.10@3850,5840 3955,5945 3965.47,5955.47 C40.1@3995,5955.47 ; C40.1@3999.4,5955.47 4060.47,5955.47 4231.98,6126.98 ; U1.29@4315,1165 4325.47,1165 C3.2@4555.47,1395 C4.1@4555.47,1490 ; PB8.1@4397.56,6580.32 4347.24,6530 4125,6530 ; C31.1@4445,2205.47 4285.47,2205.47 U17.10@3995,1915 U17.11@3895,1915 3847.1,1867.1 3742.9,1867.1 U17.13@3695,1915 U17.14@3595,1915 U17.15@3495,1915 ; R26.2@4461.5,5960 4465,5960 v1(4545,6040) 4318.97,6040 4205,6153.97 4205,6375 4160,6420 U7.1@4125,6420 4125,6530 ; RE2.5@4820,4430 4820,4395 v1(4955,4260) 5000,4305 5145,4305 C11.1@5220.47,4305 ; C10.1@4909.53,3880 v1(4909.53,3974.53) ; C26.1@5315,5875.47 6475.47,5875.47 7100,6500 ; C30.1@5564.53,2170 5569.53,2175 v1(5760,2175) ; v1(5845,6500) 7100,6500 ; pad.0@6085,1265 6035,1315 ; v1(6215,1315) 6035,1315 ; v1(6940,1975) 6895,1975 pad.26@6640,2230 ; PB4.1@7500,4086.85 7500,6490 7295,6695 7100,6500 ; 8008,2592.14 8008,2390.57 7990.93,2373.5 R56.2@7940,2373.5 7940,2151.47 7962,2129.47 7962,2090.53 7942,2070.53 7942,1963.47 7938,1959.47 7938,1920.53 7942,1916.53 7942,1898 7945,1895 ; R12.1@8043.5,1795 R49.1@8043.5,1895 8041.5,1893 7947,1893 7945,1895 ; R13.1@8149.53,2893.03 R13.1@8151.5,2895 ; v1(8165,3050) 8151.5,3036.5 R50.1@8151.5,2980 R13.1@8151.5,2895 ; 8365,2890 8156.5,2890 R13.1@8151.5,2895 ; PB6.1@8730,4086.85 8625,3981.85 8625,3622.26 8390,3387.26 X2.2@8390,3155 8875,3155 8925,3105 v1(8925,3075) ; X1.2@2540,6390 2779.33,6390 2822.23,6432.9 3072.9,6432.9 ; 3072.9,6432.9 3191.5,6551.5 R60.1@3206.65,6551.5 R61.1@3306.65,6551.5 R62.1@3406.65,6551.5 R63.2@3506.65,6551.5 R64.2@3606.65,6551.5 3606.65,6631.65 3677.43,6702.43 3799.01,6702.43 3886.91,6614.53 C7.1@3945,6614.53 4040.47,6614.53 4125,6530 ; 6035,1315 6035,1319 5955,1399 5955,1400 5935,1420 R31.2@5886.5,1420 R48.2@5886.5,1520 R29.2@5886.5,1625 R28.2@5886.5,1720 R32.2@5886.5,1820 R55.2@5886.5,1920 5886.5,1941.5 5918,1973 5959.47,1973 5987,2000.53 5987,2042 6175,2230 pad.26@6240,2230 pad.26@6340,2230 pad.26@6440,2230 pad.26@6540,2230 pad.26@6640,2230 ; pad.26@6640,2230 pad.26@6740,2230 pad.26@6840,2230 pad.26@6940,2230 pad.26@7040,2230 pad.26@7140,2230 7475,1895 7945,1895
  Bottom Layer w8: v1@7049,1231 v1(7050,1230) ; v1(8925,3075) v1(9015,3075)
  Bottom Layer w30: J1.19@1135,2535 J1.22@1235,2435 J1.24@1235,2335 J1.26@1235,2235 J1.28@1235,2135 J1.30@1235,2035 1480,2035 U12.15@1600,1915 ; J1.40@1235,1535 1465,1305 v1(1495,1305) 1535,1265 v1(1670,1265) ; v1(1280,4030) 1280,4950.61 1473.9,5144.51 1473.9,5238.9 v1(1615,5380) ; C0.2@1520,6490 1979.29,6490 2054.29,6415 2515,6415 X1.2@2540,6390 ; v1(1600,2490) 1510,2580 1510,2755 1580,2825 v1(1600,2825) 1670,2755 v1(2140,2755) ; pad.0@1680,3540 1685,3540 1789.47,3435.53 1789.47,3427 1986.47,3230 v1(2055,3230) ; U12.8@2200,1615 2200,1390 2315,1275 U1.9@2315,1165 ; v1(2245,4655) 2455,4865 v1(2455,5125) 2400,5125 v1(2325,5200) ; U14.16@2485,2260 2485,2299.33 2590.67,2405 2965.13,2405 3053.03,2317.1 3102.77,2317.1 3127.9,2342.23 3127.9,2363.57 3159.33,2395 3330,2395 U18.16@3465,2260 ; v1(3210,4465) 3283,4538 3334.47,4538 3362,4565.53 3362,4604.47 3334.47,4632 3303,4632 v1(3280,4655) ; U9.60@3465,5180 3512.9,5132.1 3512.9,5032.1 3485,5004.2 v1(3485,4715) ; v1(3520,5385) v1(3630,5385) ; U1.22@3615,1165 3615,1270 3795,1450 U17.5@3795,1615 ; U27.10@3850,5840 3805,5795 3805,5455 v1(3880,5380) 3932.57,5327.43 3932.57,5315.99 3945.99,5302.57 4024.01,5302.57 4221.44,5500 R44.3@4335,5500 ; U17.6@3895,1615 U17.11@3895,1915 ; U17.8@4095,1615 4095,1385 U1.29@4315,1165 4325,1165 4378.9,1218.9 4483.9,1218.9 4972.9,1707.9 4972.9,1852.1 U3.23@4925,1900 5025,2000 U3.1@5025,2400 ; v1(4545,6040) 4855,6040 RE1.2@4920,5975 4820,5875 RE1.5@4820,5385 4820,5275 4920,5175 RE2.2@4920,5020 4920,4780 4820,4680 RE2.5@4820,4430 ; v1(4590,3575) 4595.51,3575 4670.51,3650 4780,3650 v1(4785,3655) ; v1(4909.53,3974.53) 4909.53,4214.53 v1(4955,4260) ; PB1.1@5650,4086.85 5706.36,4143.21 5870.2,4143.21 5926.56,4086.85 PB2.1@6270,4086.85 6326.36,4143.21 6490.2,4143.21 6546.56,4086.85 PB3.1@6880,4086.85 6936.36,4143.21 7100.2,4143.21 7156.56,4086.85 PB4.1@7500,4086.85 7556.36,4143.21 7720.2,4143.21 7776.56,4086.85 PB5.1@8115,4086.85 8173.15,4145 8305,4145 8306.79,4143.21 8335.2,4143.21 8391.56,4086.85 PB6.1@8730,4086.85 ; v1(5760,2175) 5888,2303 5888,2574.47 5915.53,2602 5954.47,2602 5982,2574.47 5982,2401.18 6153.18,2230 pad.26@6240,2230 ; LCD1.1@5795,6695 5795,6550 v1(5845,6500) ; v1(6215,1315) 6288,1242 6579.47,1242 6591.47,1230 v1(7050,1230) ; v1(6805,1825) 6870,1825 6940,1895 v1(6940,1975) ; v1(8165,3050) 8270,3155 X2.2@8390,3155
IDE_1DIR: U3.10 U15.1 | length 3165.1
  Top Layer w7: U15.1@1860,2715 1895,2680 v1(1935,2680)
  Bottom Layer w10: v1(1935,2680) 1935,2656 2091.12,2656 2237.22,2509.9 2511.06,2509.9 2540.32,2480.63 2542.69,2483 3037.43,2483 3069.43,2515 3180.36,2515 3187.36,2508 3386.68,2508 3388.58,2509.9 3406.06,2509.9 3423.06,2492.9 3478.63,2492.9 3558.53,2413 3692.04,2413 3732.1,2453.06 3732.1,2473.63 3758.47,2500 4449.04,2500 4586.94,2362.1 4616.5,2362.1 4678.6,2300 U3.10@4725,2300
IDE_1OE: U3.9 U15.56 | length 3442.6
  Top Layer w7: U15.56@1500,2715 1580,2715 v1(1585,2720)
  Bottom Layer w7: v1(1585,2720) 1590,2715 1795,2715 1871,2639
  Bottom Layer w10: 1871,2639 2084.08,2639 2314.08,2409 2509.96,2409 2543.96,2443 2550.77,2443 2556.77,2449 3049.47,2449 3071.37,2427.1 3105.16,2427.1 3134.06,2456 3151.16,2456 3152.16,2457 3369.56,2457 3416.66,2409.9 3461.63,2409.9 3492.53,2379 3706.12,2379 3737.02,2409.9 4024.9,2409.9 4095,2480 4445,2480 U3.9@4625,2300
IDE_2CLKBA: U3.8 U15.30 | length 4212.9
  Top Layer w7: v1(1456,3466.61) 1456,3456 1448.6,3448.6 1448.6,3381.96 1459.96,3370.6 1500,3370.6 U15.30@1500,3365
  Bottom Layer w7: v1(1456,3466.61) 1456,3433.8 1494.8,3395 1709.12,3395 1769.12,3335
  Bottom Layer w10: 1769.12,3335 2087.02,3017.1 2195.43,3017.1 2222,2990.53 2222,2882.12 2411.22,2692.9 2493.86,2692.9 2622.96,2822 2966.31,2822 3035.1,2753.21 3035.1,2730.86 3056.06,2709.9 3105.67,2709.9 3222.57,2593 3351.47,2593 3451.37,2692.9 3496.34,2692.9 3577.44,2774 3676.41,2774 3740.31,2710.1 3785.47,2710.1 3961.57,2534 4463.12,2534 4559.22,2437.9 4640.7,2437.9 4678.6,2400 U3.8@4725,2400
IDE_2OE: U3.5 U15.29 | length 4124.3
  Top Layer w7: U15.29@1500,3390 1505,3395 v1(1505,3435)
  Bottom Layer w7: v1(1505,3435) 1693.16,3435 1775,3353.16
  Bottom Layer w10: 1775,3353.16 2094.06,3034.1 2202.47,3034.1 2239,2997.57 2239,2889.16 2391.58,2736.58 2401.06,2736.58 2427.74,2709.9 2486.82,2709.9 2615.92,2839 2973.36,2839 3052.1,2760.26 3052.1,2746.37 3071.57,2726.9 3112.71,2726.9 3229.61,2610 3344.43,2610 3444.33,2709.9 3489.3,2709.9 3570.4,2791 3683.45,2791 3747.35,2727.1 3792.51,2727.1 3968.61,2551 4470.17,2551 4566.27,2454.9 4723.7,2454.9 4778.6,2400 U3.5@4825,2400
IDE_CS0: J1.37 P1.1 U3.17 | length 4426.9
  Top Layer w10: J1.37@1135,1635 1135,1595.67 1092.1,1552.77 1092.1,1507.66 1478.66,1121.1 1551.34,1121.1 1565,1134.76 1565,1365 1675,1475 1832.45,1475 1909.45,1552 3248.72,1552 3337.1,1640.38 3337.1,1653.63 3398.47,1715 4440,1715 4462.5,1737.5 ; P1.1@4460,1860 4460,1740 4462.5,1737.5 ; U3.17@4625,1900 4462.5,1737.5
IDE_DIOR: J1.23 P2.2 U3.15 | length 5065
  Top Layer w10: J1.23@1135,2335 1190,2280 1300,2280 v1(1320,2300) ; U3.15@4625,2000 4671.4,2000 4709.3,1962.1 5351.94,1962.1 5419.04,1895 P2.2@5590,1895
  Bottom Layer w10: v1(1320,2300) 1490.96,2300 1812.96,2622 2077.04,2622 2297,2402.04 2297,2253 2505,2045 3177.56,2045 3225.06,2092.5 3721.13,2092.5 3742.63,2114 3787.37,2114 3856.37,2045 4580,2045 U3.15@4625,2000
IDE_DIOW: J1.25 P2.1 U3.21 | length 5178.4
  Top Layer w10: J1.25@1135,2235 1185,2185 1265,2185 v1(1320,2240) ; U3.21@4825,1900 4871.4,1900 4909.3,1937.9 5352.1,1937.9 5495,1795 P2.1@5590,1795
  Bottom Layer w10: v1(1320,2240) 1325,2245 1460,2245 1820,2605 2070,2605 2280,2395 2280,2245.96 2497.96,2028 3184.6,2028 3232.1,2075.5 3728.17,2075.5 3749.67,2097 3780.33,2097 3849.33,2028 4572.96,2028 4587.1,2013.86 4587.1,1984.3 4611.4,1960 4718.6,1960 4778.6,1900 U3.21@4825,1900
INT0: U9.45 U19.11 | length 2144.7
  Top Layer w10: v1(4085,4585) 4163.29,4506.71 4229.62,4506.71 4375,4361.33 v1(4375,4260) ; v1(4495,3320) 4666.06,3320 U19.11@4666.38,3320.32
  Bottom Layer w10: U9.45@3965,4780 4027.33,4780 4087,4720.33 4087,4587 v1(4085,4585) ; v1(4375,4260) 4202,4087 4202,3953 4162,3913 4162,3584.37 4426.37,3320 v1(4495,3320)
INT1: U9.44 U11.5 | length 1616
  Top Layer w10: U9.44@3865,4680 3865,4633.6 3827.1,4595.7 3827.1,4564.3 3856.5,4534.9 3887.74,4534.9 3919.9,4502.74 3919.9,4450.82 3935.82,4434.9 3987.74,4434.9 4019.9,4402.74 4019.9,4350.82 4221.72,4149 4684.08,4149 4705.45,4127.64 U11.5@5070,4127.64
INT2: U9.42 U11.3 | length 1432
  Top Layer w10: U9.42@3865,4580 3866.68,4580 3928.78,4517.9 3980.7,4517.9 4002.9,4495.7 4002.9,4443.78 4036.9,4409.78 4036.9,4357.86 4139.77,4255 4189.72,4255 4220.37,4255 4292.38,4183 4702,4183 4706.18,4178.82 U11.3@5070,4178.82
INT3: U9.41 U21.11 | length 2492.8
  Top Layer w7: U21.11@2196.38,5060.31 2196.38,5126.38 2340,5270 v1(2385,5270)
  Top Layer w10: v1(3200,5270) 3252.1,5217.9 3380.7,5217.9 3403,5195.6 3403,5137 3422.1,5117.9 3480.7,5117.9 3502.9,5095.7 3502.9,5013.06 3573.86,4942.1 3856.5,4942.1 3903,4895.6 3903,4732.96 3919.9,4716.06 3919.9,4625 ; 3920,4625 U9.41@3965,4580
  Bottom Layer w7: v1(2385,5270) 2415.4,5270 2513.9,5171.5 2571.3,5171.5 2619.8,5220
  Bottom Layer w10: 2619.8,5220 2670,5220 2720,5270 v1(3200,5270)
LCS: U9.33 U18.22 | length 1586.3
  Top Layer w10: U9.33@3765,4280 3827.1,4217.9 3827.1,4164.3 3845,4146.4 v1(3845,3760)
  Bottom Layer w10: U18.22@3765,2760 3845,2840 v1(3845,3760)
MP3_CLK: J4.1 P8.2 U3.31 U25.2 | length 5932
  Top Layer w10: P8.2@7540,2900 7730,2900 v1(7925,2705) 8395.75,2705 8447.2,2756.46 U25.2@8447.2,2763.46 U25.2@8445,2761.26 ; v1(7745,2020) 7800,2075 v1(7800,2355)
  Bottom Layer w10: U3.31@5325,2000 5655,2000 5785,1870 5785,1202 5880,1107 7762,1107 7804.04,1149.04 7804.04,1295.96 7782.32,1317.68 J4.1@7782.32,1350 7745,1387.32 v1(7745,2020) ; v1(7800,2355) 7800,2505 7925,2630 v1(7925,2705)
MP3_DEMAND: J4.3 R24.2 U11.17 | length 7748.1
  Top Layer w10: R24.2@5271.5,1570 5435,1570 5530.91,1474.09 5530.91,1170 5590.91,1110 7850,1110 7900,1160 7900,1315 J4.3@7865,1350 7827.72,1387.28 7827.72,1387.84 7820.17,1395.4 7819.6,1395.4 7393.41,1821.59 7393.41,1938.41 7171.82,2160 v1(6790,2160) ; U11.17@5343.62,4153.23 5479.44,4153.23 5504.67,4128 5527,4128 5740,3915 v1(5740,3905) ; v1(5900,3750) 5900,2590 v1(5935,2555)
  Bottom Layer w10: v1(5740,3905) 5745,3905 v1(5900,3750) ; v1(5935,2555) 5935,2410 6190,2155 6195,2160 v1(6790,2160)
MP3_DREQ: U11.15 U24.1 | length 4606.1
  Top Layer w7: U24.1@7105,1702.01 7105,1920 v1(7110,1925) ; v1(7455,2245) 7560,2140 v1(7560,2110)
  Top Layer w10: U11.15@5343.62,4102.05 5430.28,4102.05 5555,3977.33 5555,3865 5610,3810 5906.4,3810 6056.4,3660 6056.4,3101.69 5973.32,3018.6 5973.32,2383.32 v1(5935,2345) ; v1(6865,2110) 6880,2110 v1(7005,1985)
  Bottom Layer w7: v1(7110,1925) 7134.5,1949.5 7353.54,1949.5 7492.54,2088.5 7492.75,2088.5 7514.25,2110 v1(7560,2110)
  Bottom Layer w10: v1(5935,2345) 6018,2262 6040.33,2262 6192.33,2110 v1(6865,2110) ; v1(7005,1985) 7050,1985 v1(7110,1925)
MP3_XCS: P8.3 U3.32 U23.9 | length 5055.8
  Top Layer w7: v1(8975,3185) 9112.2,3047.8 U23.9@9112.2,2983.94
  Bottom Layer w7: U3.32@5225,2000 5253.72,2000 5304.12,2050.4 5353.48,2050.4 5363.08,2060 5905.75,2060 5918.25,2072.5 5961.75,2072.5 5984.25,2050 7357.87,2050 7464.37,2156.5 7464.58,2156.5 7524.5,2216.42 7524.5,2740.32 7499.07,2765.75 7499.07,2959.07 P8.3@7540,3000 7806.4,3266.4 8883.8,3266.4 8965.2,3185 v1(8975,3185)
MP3_XDCS: P8.1 U3.30 U23.12 | length 4842.6
  Top Layer w7: v1(8915,3185) 8962.2,3137.8 U23.12@8962.2,2983.94
  Bottom Layer w7: U3.30@5225,1900 5288.6,1963.6 5288.6,2015.08 5309.92,2036.4 5361.4,2036.4 ; 7990,3191.4 8908.6,3191.4 v1(8915,3185)
  Bottom Layer w10: 5361.4,2036.4 5904.07,2036.4 5924.67,2057 5955.33,2057 5977.83,2034.5 7364.29,2034.5 7470.79,2141 7471,2141 7540,2210 P8.1@7540,2800 7598.6,2800 7990,3191.4
MUX_S: P4.1 U3.18 U12.1 U16.1 U17.1 | length 3866.4
  Top Layer w10: U12.1@1500,1615 1540,1575 2405,1575 U16.1@2445,1615 2490,1570 3205,1570 v1(3225,1590) ; U17.1@3395,1615 3455,1675 4600,1675 U3.18@4725,1800
  Bottom Layer w10: v1(3225,1590) 3370,1590 U17.1@3395,1615 ; P4.1@4250,1760 4292,1802 4725,1802 U3.18@4725,1800
NetC44_1: C44.1 U24.20 | length 2726.3
  Top Layer w7: U24.20@6705,1327.99 v1(6705,1470) ; v1(7575,1720) v1(7985,1720)
  Bottom Layer w7: v1(6705,1470) 6705.5,1469.5 7369.5,1469.5 7575,1675 v1(7575,1720) ; v1(7985,1720) 9060,1720 C44.1@9130,1650
NetC44_2: C44.2 J2.D R52.2 | length 662.9
  Top Layer w10: R52.2@8536.5,1590 8661.5,1465 J2.D@8915,1465 9030,1580 C44.2@9030,1650
NetC45_1: C45.1 U24.24 | length 2168.4
  Top Layer w7: U24.24@6905,1327.99 6905,1400 v1(6935,1430) ; v1(7620,1680) 7870,1680 v1(7875,1675)
  Bottom Layer w7: v1(6935,1430) 7365,1430 7615,1680 v1(7620,1680) ; v1(7875,1675) 7913.26,1675 7953.76,1634.5 8663.02,1634.5 8714.92,1686.4 8793.6,1686.4 C45.1@8830,1650
NetC45_2: C45.2 J2.A R51.2 | length 1034.3
  Top Layer w7: 8685.2,1071.3 J2.A@8915,1071.3
  Top Layer w10: v1@8675,1220 R51.2@8536.5,1220 8685.2,1071.3
  Bottom Layer w10: v1(8680,1215) 8730,1265 C45.2@8730,1650
NetC46_1: C46.1 U24.22 | length 159.8
  Top Layer w10: U24.22@6805,1327.99 6805,1245 6845.47,1204.53 C46.1@6845.47,1185
NetC47_1: C47.1 R51.1 | length 244
  Top Layer w10: C47.1@8229.53,1220 R51.1@8473.5,1220
NetC48_1: C48.1 R52.1 | length 244
  Top Layer w10: C48.1@8229.53,1590 R52.1@8473.5,1590
NetC49_1: C49.1 R53.1 | length 244
  Top Layer w10: C49.1@8229.53,1405 R53.1@8473.5,1405
NetJ1_3: J1.3 U15.43 | length 521.5
  Top Layer w7: v1(1400,3060) 1405,3060 1425,3040 U15.43@1500,3040
  Bottom Layer w7: J1.3@1135,3335 1135,3325 1193.6,3266.4 1193.6,3217.85 1217.85,3193.6 1266.4,3193.6 v1(1400,3060)
NetJ1_4: J1.4 U15.33 | length 283.6
  Top Layer w7: J1.4@1235,3335 1399.49,3335 1444.49,3290 U15.33@1500,3290
NetJ1_5: J1.5 U15.44 | length 487.5
  Top Layer w7: v1(1355,3020) 1375,3020 1380,3015 U15.44@1500,3015
  Bottom Layer w7: J1.5@1135,3235 1190.4,3179.6 1248.95,3179.6 1276.4,3152.15 1276.4,3098.6 v1(1355,3020)
NetJ1_6: J1.6 U15.34 | length 277.4
  Top Layer w7: J1.6@1235,3235 1265,3265 U15.34@1500,3265
NetJ1_7: J1.7 U15.45 | length 457.9
  Top Layer w7: v1(1355,2960) 1379.5,2984.5 1494.5,2984.5 U15.45@1500,2990
  Bottom Layer w7: J1.7@1135,3135 1176.45,3135 1217.85,3093.6 1234.95,3093.6 1276.4,3052.15 1276.4,3038.6 v1(1355,2960)
NetJ1_8: J1.8 U15.36 | length 298.1
  Top Layer w7: J1.8@1235,3135 1310,3135 1390,3215 U15.36@1500,3215
NetJ1_9: J1.9 U15.47 | length 424.6
  Top Layer w7: v1(1412,2949) 1426,2949 1435,2940 U15.47@1500,2940
  Bottom Layer w7: J1.9@1135,3035 1176.45,3035 1235.05,2976.4 1252.15,2976.4 1304.05,2924.5 1369.7,2924.5 1394.2,2949 v1(1412,2949)
NetJ1_10: J1.10 U15.37 | length 332.2
  Top Layer w7: J1.10@1235,3035 1235,3040.2 1384.8,3190 U15.37@1500,3190
NetJ1_11: J1.11 U15.48 | length 398.1
  Top Layer w7: v1(1355,2885) 1380,2910 1495,2910 U15.48@1500,2915
  Bottom Layer w7: J1.11@1135,2935 1176.4,2893.6 1346.4,2893.6 v1(1355,2885)
NetJ1_12: J1.12 U15.38 | length 410.3
  Top Layer w7: J1.12@1235,2935 1276.4,2976.4 1276.4,3061.8 1379.6,3165 U15.38@1500,3165
NetJ1_13: J1.13 U15.49 | length 422.6
  Top Layer w7: v1(1400,2845) 1400,2860 1430,2890 U15.49@1500,2890
  Bottom Layer w7: J1.13@1135,2835 1176.4,2876.4 1252.15,2876.4 1279.05,2849.5 1395.5,2849.5 v1(1400,2845)
NetJ1_14: J1.14 U15.40 | length 507.8
  Top Layer w7: J1.14@1235,2835 1290.4,2890.4 1290.4,3056 1385.4,3151 1420,3151 1456,3115 U15.40@1500,3115
NetJ1_15: J1.15 U15.51 | length 408.5
  Top Layer w7: v1(1355,2805) 1359.5,2809.5 1414.7,2809.5 1445.2,2840 U15.51@1500,2840
  Bottom Layer w7: J1.15@1135,2735 1193.6,2793.6 1252.15,2793.6 1263.55,2805 v1(1355,2805)
NetJ1_16: J1.16 U15.41 | length 585.9
  Top Layer w7: J1.16@1235,2735 1304.4,2804.4 1304.4,3050.2 1380.3,3126.1 1425.1,3126.1 1461.2,3090 U15.41@1500,3090
NetJ1_17: J1.17 U15.52 | length 506.3
  Top Layer w7: v1(1355,2745) 1405.5,2795.5 1420.5,2795.5 1440,2815 U15.52@1500,2815
  Bottom Layer w7: J1.17@1135,2635 1185,2685 1185,2750 1214.6,2779.6 1320.4,2779.6 v1(1355,2745)
NetJ1_18: J1.18 U15.42 | length 660
  Top Layer w7: J1.18@1235,2635 1318.4,2718.4 1318.4,3044.41 1369.7,3095.7 1435.7,3095.7 1448.6,3082.8 1448.6,3081.96 1459.96,3070.6 1494.4,3070.6 U15.42@1500,3065
NetJ1_29: J1.29 R23.1 | length 2832
  Top Layer w7: v1(1145,3690) 1145,4025 1465,4345 1465,4515 1411.5,4568.5 R23.1@1411.5,4675 ; v1(1185,2390) v1(1185,3605)
  Bottom Layer w7: J1.29@1135,2035 1135,2076.45 1185,2126.45 v1(1185,2390) ; v1(1145,3690) 1145,3645 v1(1185,3605)
NetJ1_38: J1.38 R30.1 | length 3032.7
  Top Layer w7: J1.38@1235,1635 1300,1700 1300,2140 1355.5,2195.5 v1(1355.5,2415) ; v1(1415,4355) 1416.5,4356.5 R30.1@1416.5,4445
  Bottom Layer w10: v1(1355.5,2415) 1358,2417.5 1358,2695.67 1449,2786.67 1449,3066 1277.9,3237.1 1277.9,3707.9 1420.5,3850.5 1420.5,3865 1422,3866.5 1422,4348 v1(1415,4355)
NetJ2_E: J2.E R53.2 | length 632
  Top Layer w10: R53.2@8536.5,1405 8765,1405 8847.82,1322.18 8923.76,1322.18 8977.79,1268.15 J2.E@9111.85,1268.15
NetJP1_1: JP1.1 U7.3 | length 490.3
  Top Layer w10: JP1.1@3760,6650 3845,6565 3845,6465 3990,6320 U7.3@4055,6320
NetJP1_2: JP1.2 U9.46 | length 2684.2
  Top Layer w10: v1(3290,6310) 3290,6300 3395.1,6194.9 3395.1,6117.26 3612.1,5900.26 3612.1,5824.3 3942.57,5493.83 3942.57,5320.13 3964.77,5297.93 v1(3964.77,5137.9) ; U9.46@3865,4755.9 U9.46@3865,4780
  Bottom Layer w10: v1(3290,6310) 3312,6332 3745,6332 3830,6417 3830,6480 JP1.2@3760,6550 ; U9.46@3865,4780 3927.1,4842.1 3980.7,4842.1 4002.9,4864.3 4002.9,5099.77 v1(3964.77,5137.9)
NetJP1_3: JP1.3 R8.1 | length 1658.9
  Top Layer w10: v1(2180,6475) R8.1@2180,6543.5
  Bottom Layer w10: v1(2180,6475) 2205,6450 JP1.3@3760,6450
NetLCD1_3: LCD1.3 P3.2 | length 2755
  Top Layer w7: P3.2@3985,5455 4190.5,5660.5 4559.29,5660.5 4594.5,5695.71 4594.5,6090.69 4743.31,6239.5 5444.5,6239.5 5810,6605 5905,6605 LCD1.3@5995,6695
NetLCD1_7: LCD1.7 U20.18 | length 5495.5
  Top Layer w7: U20.18@1776.18,4978.62 1776.18,5021.11 2190,5434.93 v1(2190,5440)
  Bottom Layer w7: v1(2190,5440) 2236.5,5486.5 2268.42,5486.5 2283.5,5501.58 2283.5,5735 2652.1,6103.6 3465.08,6103.6 3466.48,6105 3533.52,6105 3534.92,6103.6 3880.01,6103.6 4038.91,6262.5 5962.5,6262.5 LCD1.7@6395,6695
NetLCD1_8: LCD1.8 U20.17 | length 5569.2
  Top Layer w7: U20.17@1801.77,4978.62 1801.77,5022.66 2164.12,5385 2189.45,5385 2249.45,5445 v1(2250,5445)
  Bottom Layer w7: v1(2250,5445) 2255.2,5445 2300.5,5490.3 2300.5,5727.96 2659.14,6086.6 3882.81,6086.6 4044.71,6248.5 6048.5,6248.5 LCD1.8@6495,6695
NetLCD1_9: LCD1.9 U20.16 | length 5662.5
  Top Layer w7: U20.16@1827.36,4978.62 1827.36,5024.2 2174.04,5370.88 2230.33,5370.88 2304.45,5445 v1(2310,5445)
  Bottom Layer w7: v1(2310,5445) 2310,5455 2317.5,5462.5 2317.5,5720.92 2666.18,6069.6 3885.61,6069.6 4050.51,6234.5 6134.5,6234.5 LCD1.9@6595,6695
NetLCD1_10: LCD1.10 U20.15 | length 5755.6
  Top Layer w7: U20.15@1852.95,4978.62 1852.95,5025.75 2181.08,5353.88 2237.37,5353.88 2268.49,5385 v1(2300,5385)
  Bottom Layer w7: v1(2300,5385) 2304.45,5385 2348.5,5429.05 2348.5,5727.88 2673.22,6052.6 3888.4,6052.6 4056.3,6220.5 6220.5,6220.5 LCD1.10@6695,6695
NetLCD1_11: LCD1.11 U20.14 | length 5846.2
  Top Layer w7: U20.14@1878.54,4978.62 1878.54,5027.3 2181.24,5330 2267.94,5330 v1(2269.04,5331.11)
  Bottom Layer w7: v1(2269.04,5331.11) 2300.55,5331.11 2365.5,5396.05 2365.5,5720.83 2680.27,6035.6 3891.2,6035.6 4062.1,6206.5 6306.5,6206.5 LCD1.11@6795,6695
NetLCD1_12: LCD1.12 U20.13 | length 5921.5
  Top Layer w7: U20.13@1904.13,4978.62 1904.13,5028.85 2165.28,5290 v1(2220,5290)
  Bottom Layer w7: v1(2220,5290) 2222.61,5292.61 2286.09,5292.61 2382.5,5389.01 2382.5,5713.79 2687.31,6018.6 3894,6018.6 4067.9,6192.5 6392.5,6192.5 LCD1.12@6895,6695
NetLCD1_13: LCD1.13 U20.12 | length 5996.8
  Top Layer w7: U20.12@1929.72,4978.62 1929.72,5030.4 2144.32,5245 v1(2175,5245)
  Bottom Layer w7: v1(2175,5245) 2181.5,5251.5 2269.03,5251.5 2399.5,5381.97 2399.5,5706.75 2694.35,6001.6 3896.8,6001.6 4073.7,6178.5 6478.5,6178.5 LCD1.13@6995,6695
NetLCD1_14: LCD1.14 U20.11 | length 6070
  Top Layer w7: U20.11@1955.32,4978.62 1955.32,5031.95 2113.37,5190 v1(2145,5190)
  Bottom Layer w7: v1(2145,5190) 2161.5,5206.5 2248.07,5206.5 2416.5,5374.93 2416.5,5696.1 2705,5984.6 3899.6,5984.6 4079.5,6164.5 6564.5,6164.5 LCD1.14@7095,6695
NetLED1_2: LED1.2 R40.2 | length 149.6
  Top Layer w10: LED1.2@2233.9,6000 R40.2@2383.5,6000
NetLED2_2: LED2.2 R41.2 | length 149.6
  Top Layer w10: LED2.2@2233.9,6115 R41.2@2383.5,6115
NetP3_1: P3.1 R44.2 | length 268.6
  Top Layer w10: P3.1@3985,5355 4190,5355 R44.2@4235,5400
NetP3_3: P3.3 U22.5 | length 382.7
  Top Layer w7: P3.3@3985,5555 4177.5,5747.5 U22.5@4288,5747.5